# Altium PCB JDB-001.PcbDoc (part 1 of 2)
Units mil, origin at the board's own origin, x right, y up, seen from the top; angles counter-clockwise.
Board outline 2292 x 2004 mil, 4 copper layers (Top, Layer 2, Layer 3, Bottom), stack 24.2 mil thick; 85 components, 86 nets, 377 pads, 352 vias.
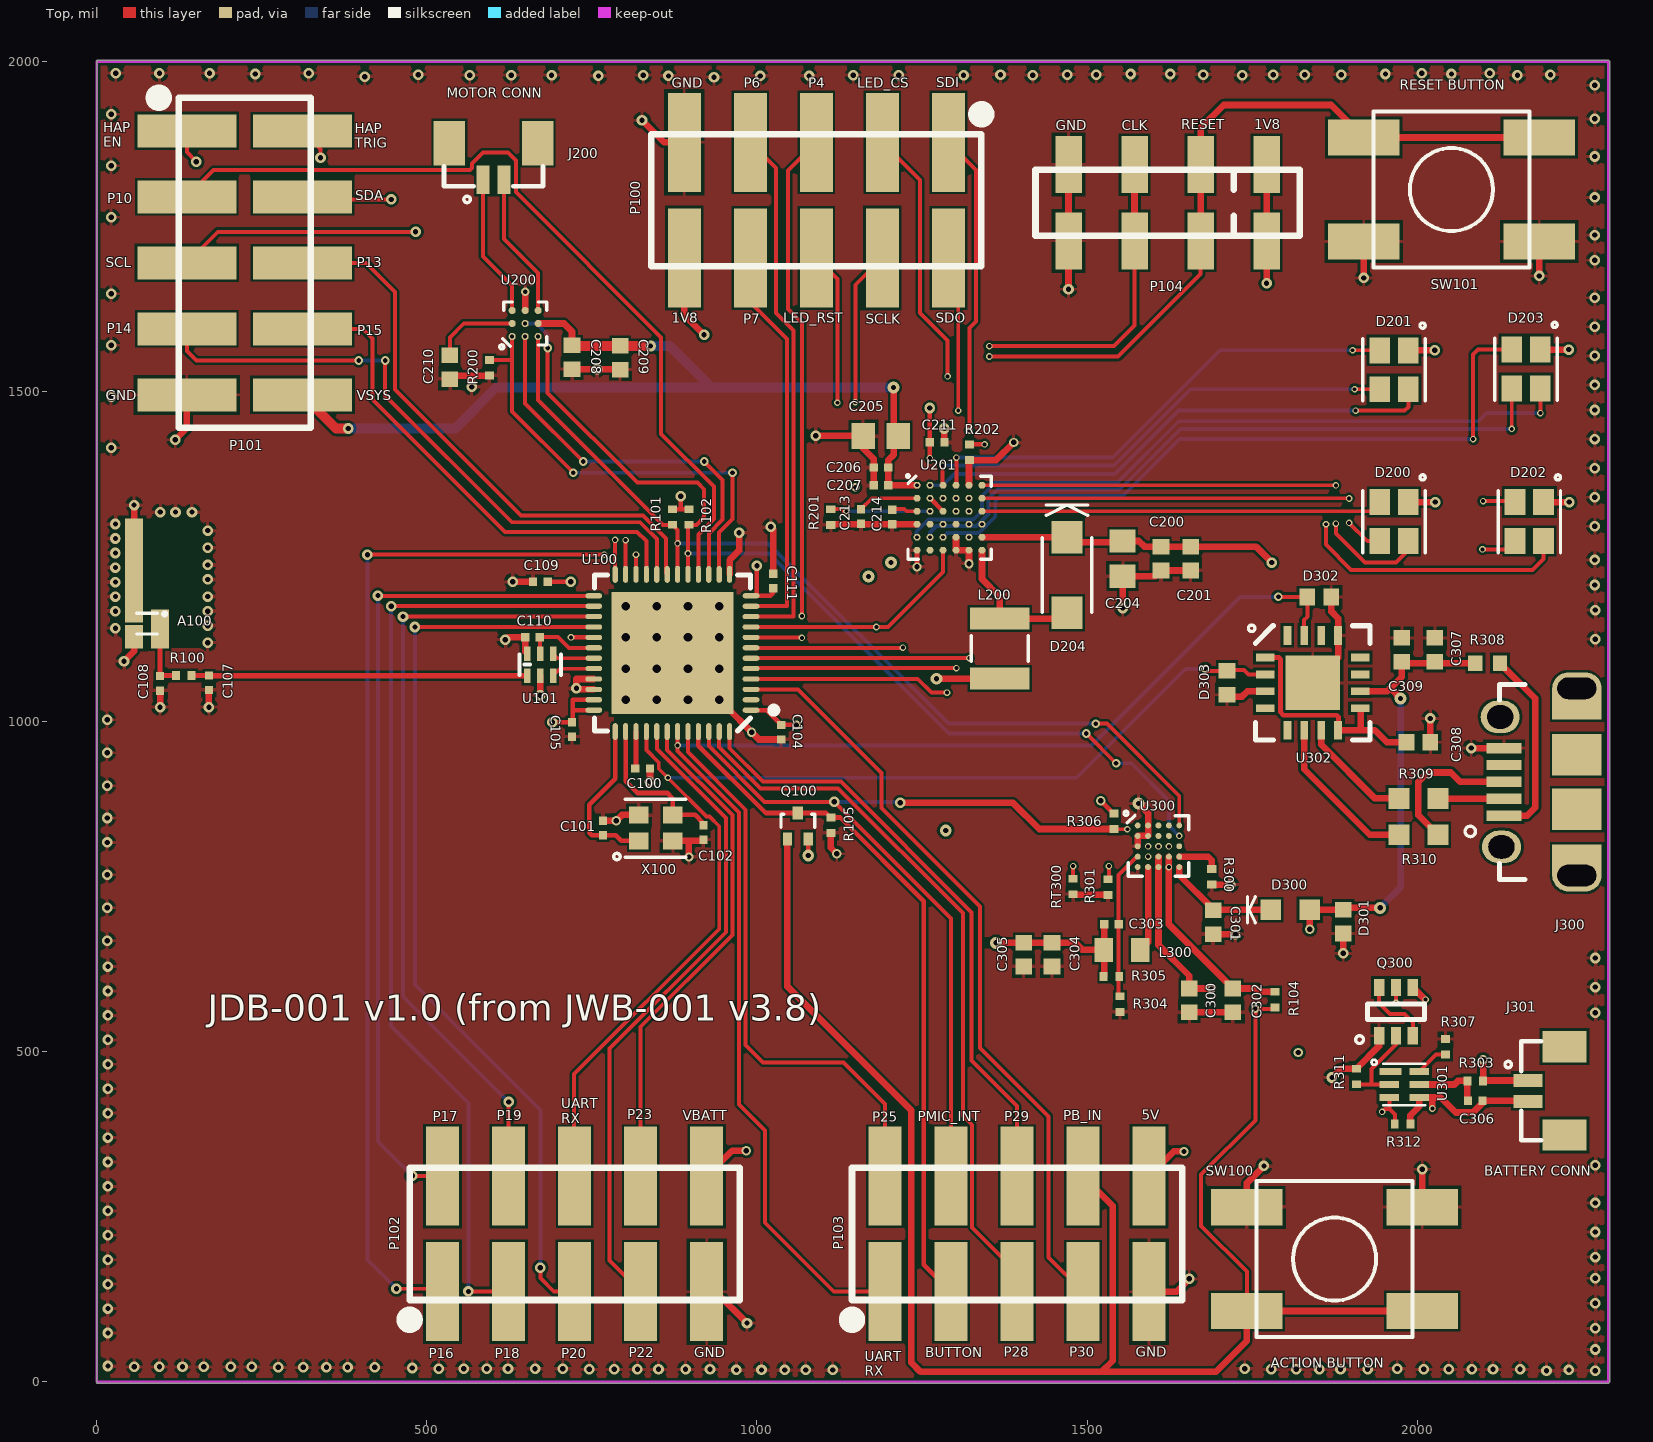
[diagram p0: Top view]
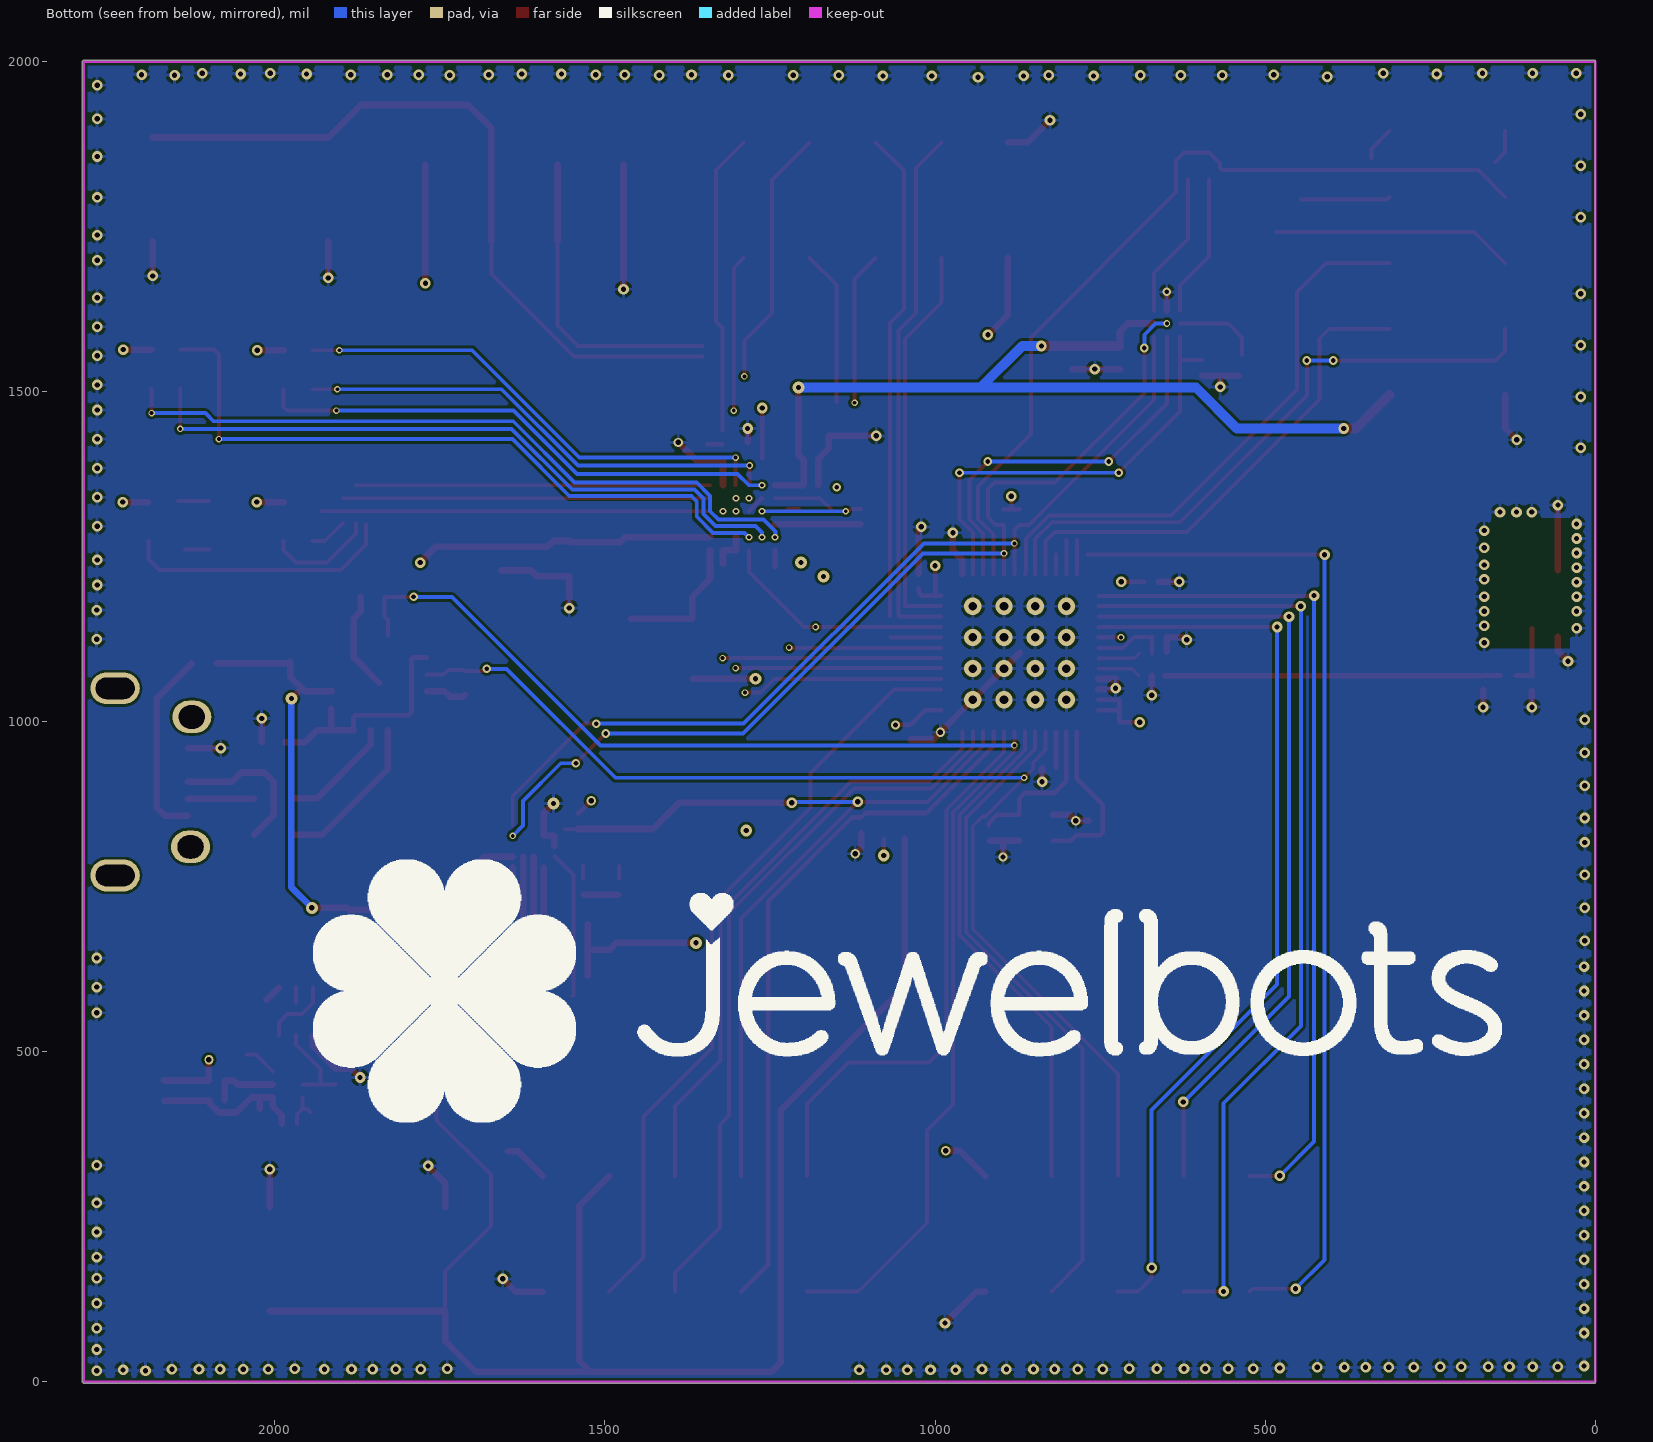
[diagram p1: Bottom view, seen from below]
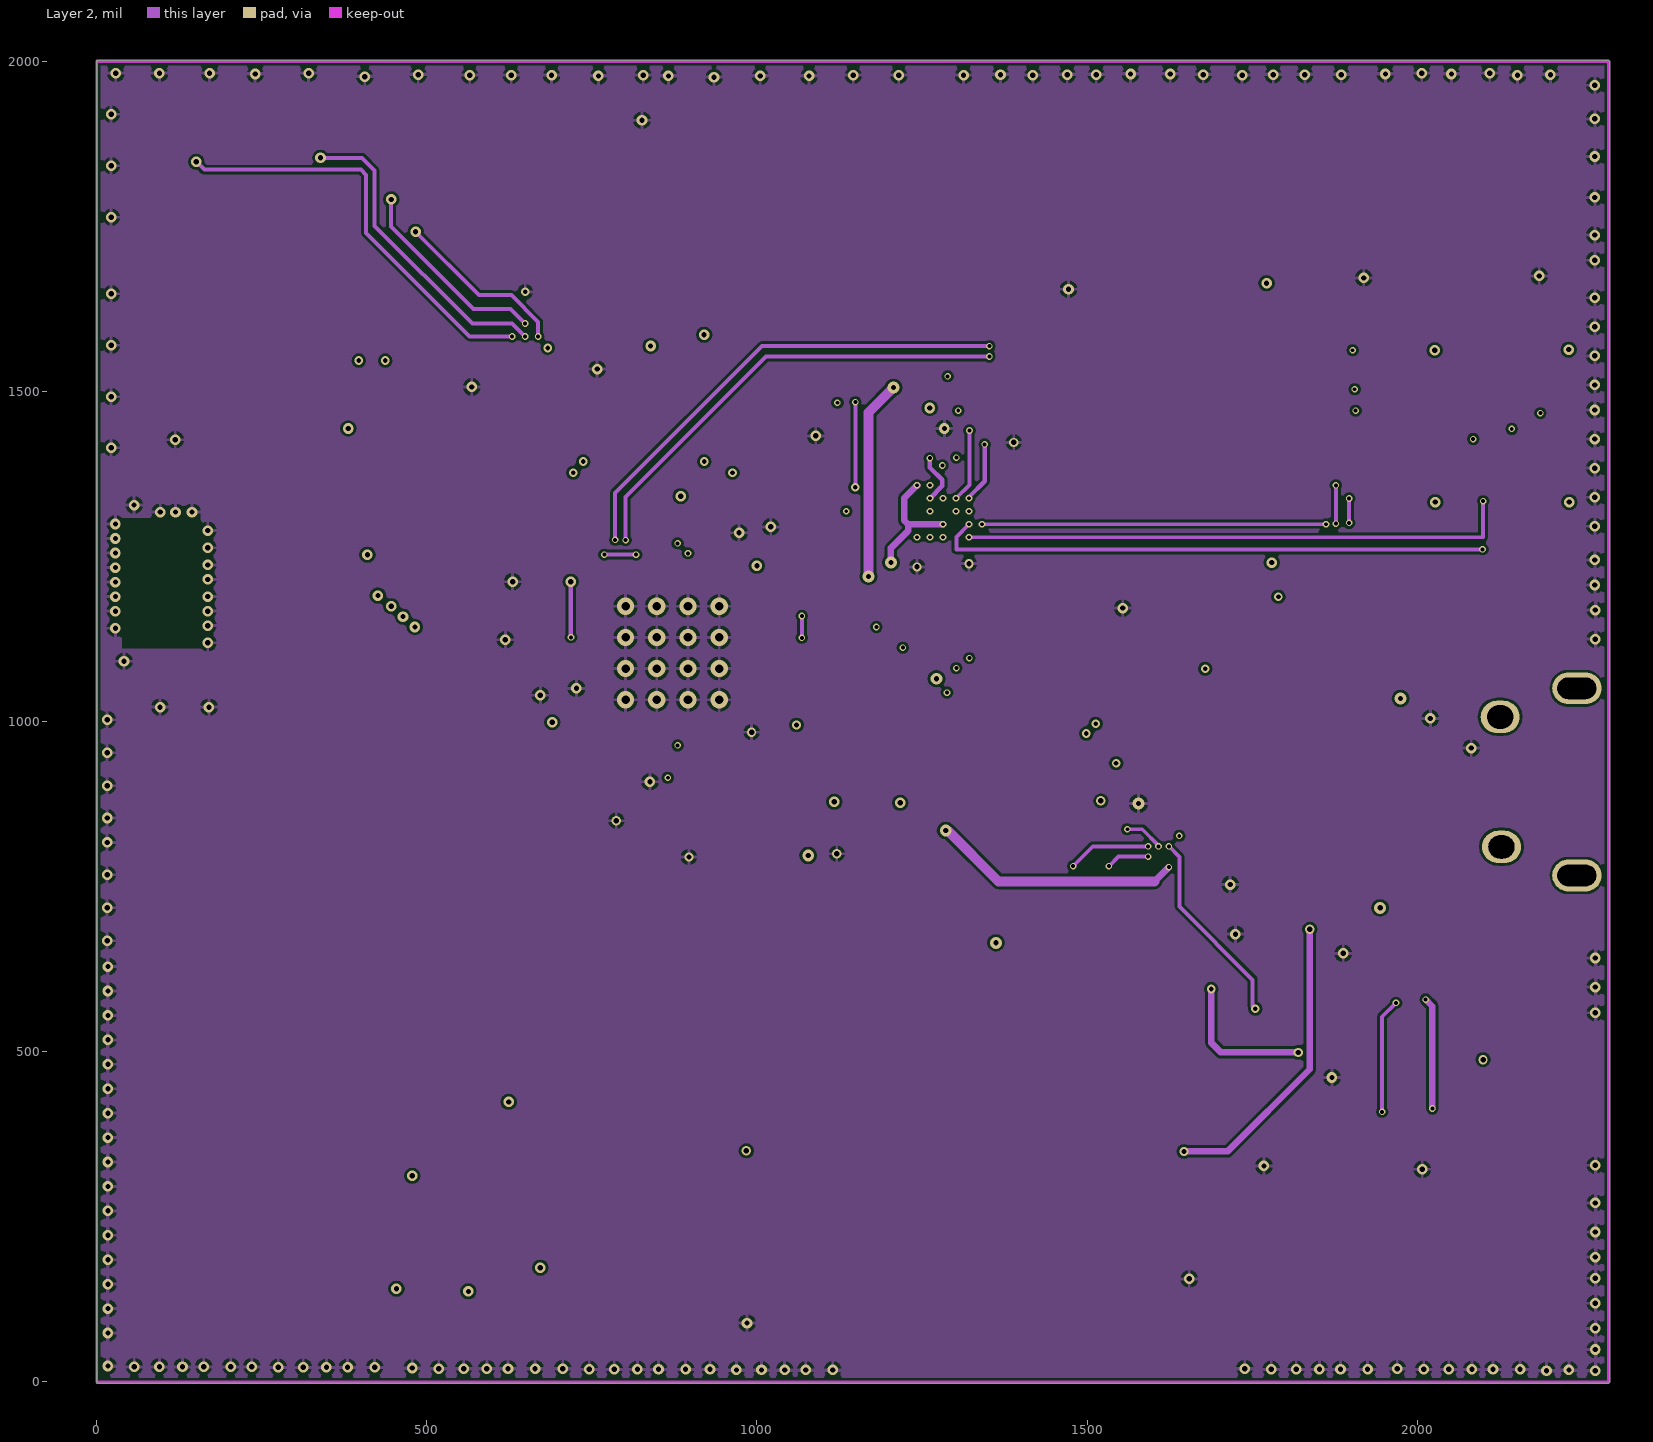
[diagram p2: Layer 2]
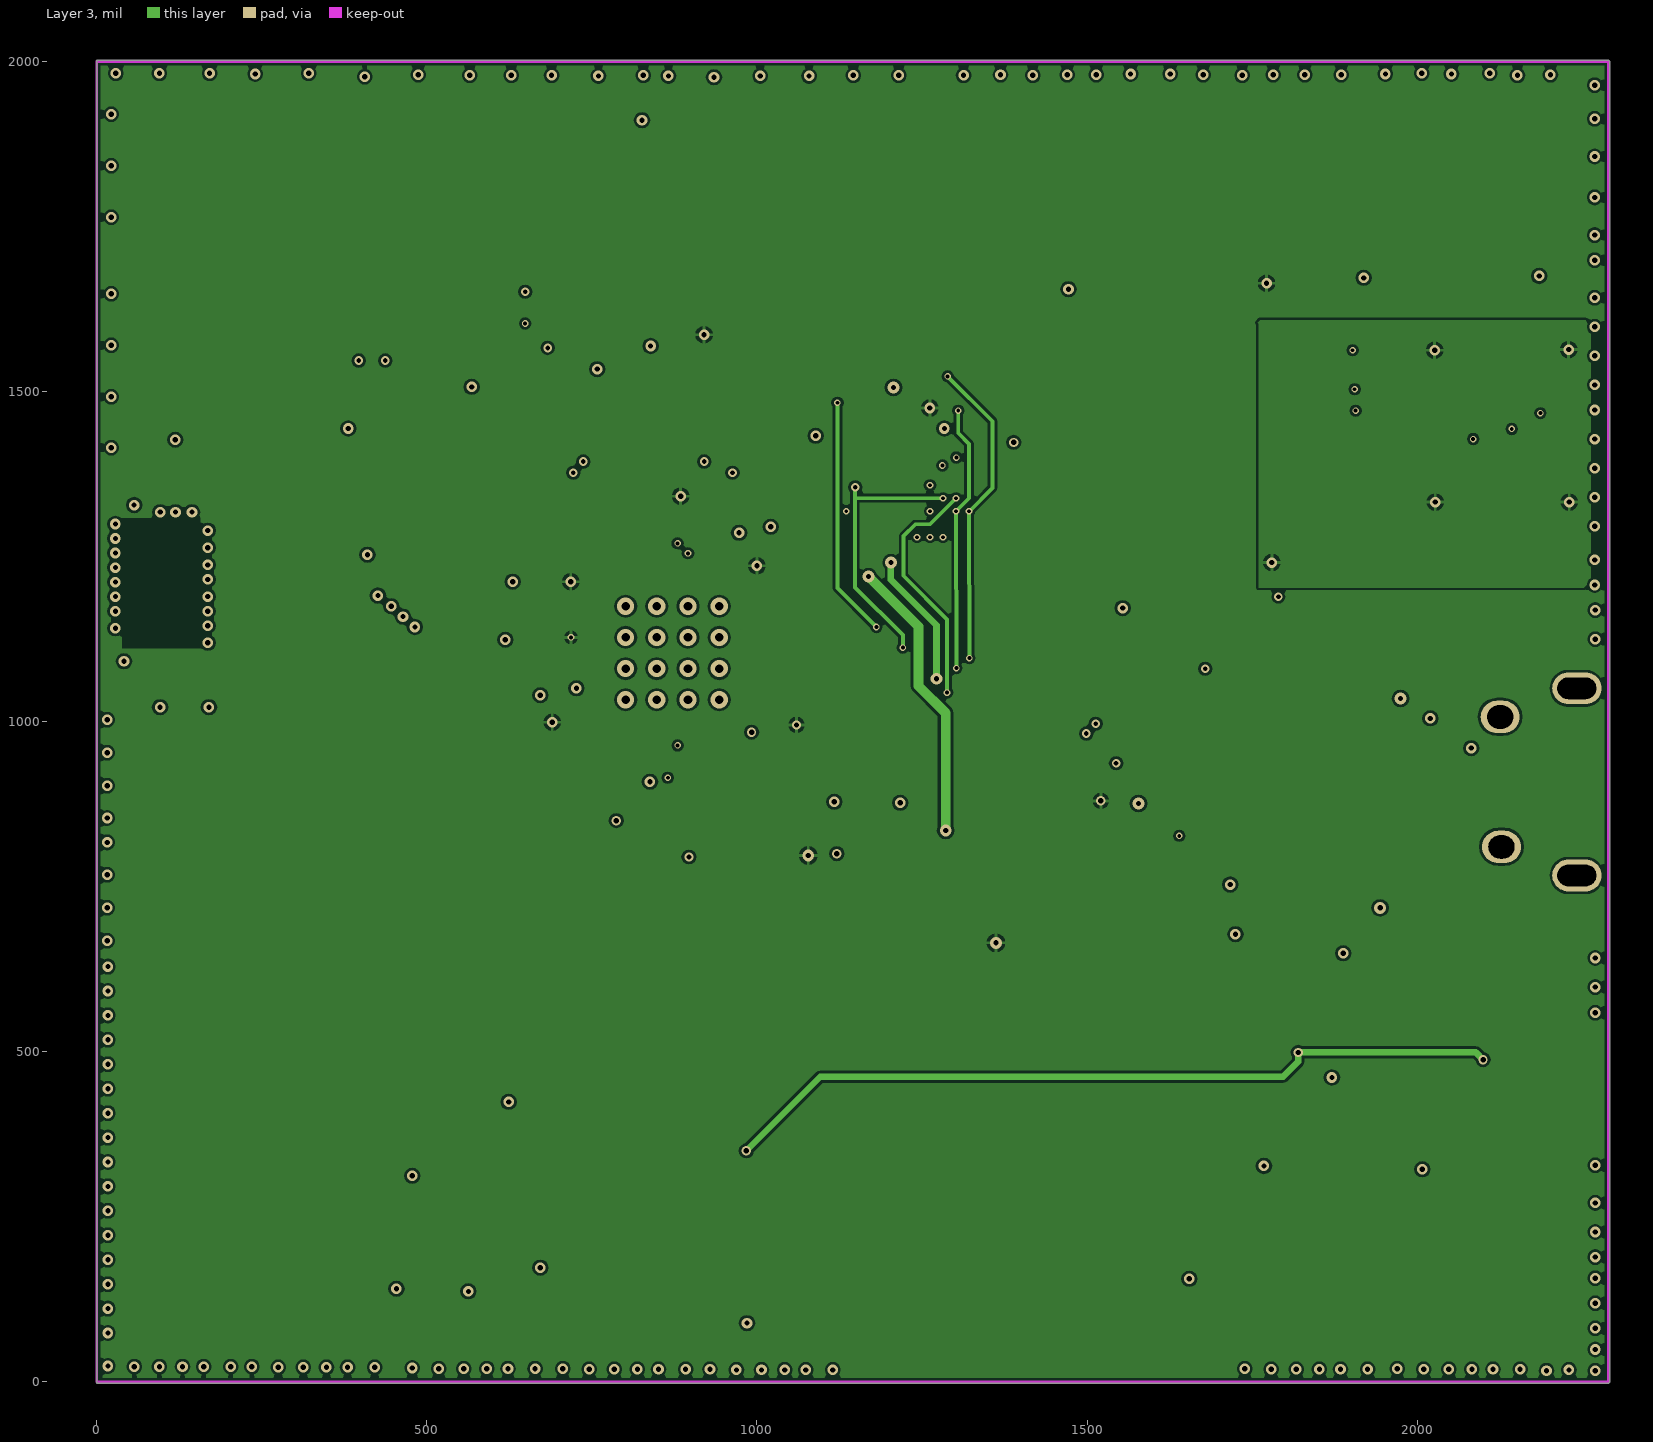
[diagram p3: Layer 3]

## Layer stack, top to bottom
Top Solder: solder mask 0.4, Solder Resist, Dk 3.5
Top: signal copper 1.4
Core 1: prepreg 5, FR-4, Dk 4.2
Layer 2: signal copper 0.7
Core 2: core 10, FR-4, Dk 4.2
Layer 3: signal copper 0.7
Core 3: prepreg 5, FR-4, Dk 4.2
Bottom: signal copper 1.4
Bottom Solder: solder mask 0.4, Solder Resist, Dk 3.5

## Board outline
0,-2 2290,-2 2292,0 2292,2000 2290,2002 0,2002

## Design rules (kind name [scope] priority, off if disabled: settings)
Clearance Clearance_U200 [InComponent('U200') OR InComponent('U201')] p1: gap=4 except(2.92: Arc-Track Arc-SMDPad Track-Track Track-SMDPad; 2.99: SMDPad-SMDPad; 3: Arc-Arc Arc-THPad Arc-Via Track-THPad Track-Via SMDPad-THPad SMDPad-Via THPad-THPad THPad-Via Via-Via)
Clearance [All] p2: gap=4
Height [All] p1: minheight=0 maxheight=1000 prefheight=100
HoleSize [All] p1: absolutevalues=TRUE maxlimit=100 minlimit=6 maxpercent=80.000 minpercent=20.000
HoleToHoleClearance [All] p1: gap=6 allowstackedmicrovias=TRUE
MinimumSolderMaskSliver [All] p1: minsoldermaskwidth=1
PlaneClearance [All] p1: clearance=4
PolygonConnect [All] p1: connectstyle=Relief reliefconductorwidth=5 reliefentries=4 polygonreliefangle="90 Angle" airgapwidth=5
RoutingVias [All] p1: holewidth=7 width=13 viastyle="Through Hole" minholewidth=6 minwidth=10 maxholewidth=28 maxwidth=50
SilkToSilkClearance [All] p1: silktosilkclearance=1
SilkToSolderMaskClearance [IsPad] p1: minsilkscreentomaskgap=0 clearancetoexposedcopper=TRUE
SolderMaskExpansion SolderMaskExpansion_via [IsVia] p1: expansion=-10
SolderMaskExpansion [All] p2: expansion=2
Width [All] p1: maxlimit=100 minlimit=4 preferedwidth=6
23 further rules are at their usual default settings.

## Classes and differential pairs
component class Interfaces: C200 C201 C204 C205 C206 C207 C208 C209 C210 C211 C213 C214 D200 D201 D202 D203 D204 J200 L200 R200 R201 R202 U200 U201
component class "Power Supplies": C300 C301 C302 C303 C304 C305 C306 C307 C308 C309 D300 D301 D302 D303 J300 J301 L300 Q300 R300 R301 R303 R304 R305 R306 R307 R308 R309 R310 R311 R312 RT300 U300 U301 U302
component class Top: A100 C100 C101 C102 C104 C105 C107 C108 C109 C110 C111 P100 P101 P102 P103 P104 Q100 R100 R101 R102 R104 R105 SW100 SW101 U100 U101 X100

## Components (designator, comment, footprint, x,y, rotation, side; value= is the part's Value field where it differs from the comment)
A100 "Part Number" 2450AT07A0100 76.35,1148.4 r90 top
C100 "Part Number0.1uFDNP" "Cap 0201 HD" 827,929 r0 top
C101 "Part Number15pFDNP" "Cap 0201 HD" 767,839 r90 top
C102 "Part Number15pFDNP" "Cap 0201 HD" 919,832 r270 top
C104 "Part Number0.1uFDNP" "Cap 0201 HD" 1037,984 r270 top
C105 "Part Number1nFDNP" "Cap 0201 HD" 720,988 r270 top
C107 "Part NumberDNPDNP" "Cap 0201 HD" 170,1058.98 r270 top
C108 "Part NumberDNPDNP" "Cap 0201 HD" 96,1057.98 r270 top
C109 "Part Number47nFDNP" "Cap 0201 HD" 672,1212 r180 top
C110 "Part Number2.2nFDNP" "Cap 0201 HD" 660,1128 r180 top
C111 "Part Number0.1uFDNP" "Cap 0201 HD" 1025,1213 r90 top
C200 "Part Number1.0uFDNP" "Cap 0402 HD" 1612,1247 r270 top
C201 "Part Number1.0uFDNP" "Cap 0402 HD" 1657,1247 r270 top
C204 "Part Number10uFDNP" "Cap 0603" 1554,1247 r270 top
C205 "Part Number10uFDNP" "Cap 0603" 1187.79,1432.84 r180 top
C206 "Part Number0.1uFDNP" "Cap 0201 HD" 1187.79,1384.84 r180 top
C207 "Part Number0.1uFDNP" "Cap 0201 HD" 1187.79,1357.84 r180 top
C208 "Part Number4.7uFDNP" "Cap 0402 HD" 720,1552 r270 top
C209 "Part Number1.0uFDNP" "Cap 0402 HD" 793,1551 r270 top
C210 "Part Number1.0uFDNP" "Cap 0402 HD" 535,1537 r270 top
C211 "Part Number0.1uFDNP" "Cap 0201 HD" 1273,1423 r0 top
C213 "Part Number1.0uFDNP" "Cap 0201 HD" 1157.79,1310.84 r270 top
C214 "Part Number0.1uFDNP" "Cap 0201 HD" 1204.79,1309.84 r90 top
C300 "Part Number4.7uFDNP" "Cap 0402 HD" 1655,577.73 r270 top
C301 "Part Number1.0uFDNP" "Cap 0402 HD" 1691,696.23 r270 top
C302 "Part Number4.7uFDNP" "Cap 0402 HD" 1721,577.73 r270 top
C303 "Part Number22pFDNP" "Cap 0201 HD" 1537,693.23 r0 top
C304 "Part Number4.7uFDNP" "Cap 0402 HD" 1447,647.23 r270 top
C305 "Part Number1.0uFDNP" "Cap 0402 HD" 1404,647.23 r270 top
C306 "Part Number0.1uFDNP" "Cap 0201 HD" 2088,425.73 r0 top
C307 "Part Number1.0uFDNP" "Cap 0402 HD" 2027,1108.73 r90 top
C308 "Part Number0.1uFDNP" "Cap 0402 HD" 2002,968.73 r0 top
C309 "Part Number4.7uFDNP" "Cap 0402 HD" 1977,1108.73 r90 top
D200 "Part Number" 4-PLCC 1965,1303 r90 top
D201 "Part Number" 4-PLCC 1965,1533 r90 top
D202 "Part Number" 4-PLCC 2170,1303 r90 top
D203 "Part Number" 4-PLCC 2165,1534 r90 top
D204 "Part NumberVoltage Rated" SOD-123F_U 1469.79,1221.84 r270 top
D300 "Part NumberVoltage Rated" "Diode 0603 HD" 1808,715.23 r180 top
D301 "Part NumberVoltage Rated" "CAP 0402 HD" 1888,697.23 r270 top
D302 "Part NumberVoltage Rated" "CAP 0402 HD" 1852,1188.73 r180 top
D303 "Part NumberVoltage Rated" "CAP 0402 HD" 1712,1058.73 r270 top
J200 "BM02B-SURS-TF" BM02B-SURS-TF 601,1821 r0 top
J300 "Part Number" USB_Micro_RA_W-TABS 2242,908.73 r90 top
J301 "BM02B-SURS-TF" BM02B-SURS-TF 2168,440.73 r270 top
L200 "Part Number4.7uHDNP" "IND 1008" 1367.79,1110.84 r90 top
L300 "Part Number2.2uHDNP" "IND 0603" 1553,654.23 r180 top
P100 "Value" "Molex 15-91-2100" 1090,1790 r180 top
P101 "Value" "Molex 15-91-2100" 224,1695 r270 top
P102 "Value" "Molex 15-91-2100" 724,224 r0 top
P103 "Value" "Molex 15-91-2100" 1394,224 r0 top
P104 "Value" LIST_1x4_SMD 1772,1786 r180 top
Q100 "Part Number" SOT-723 1062,842 r90 top
Q300 "Part Number" SC70-6 1968,560.73 r90 top
R100 "Part Number0DNP" "RES 0201 HD" 132,1069.98 r180 top
R101 "Part Number3.3kDNP" "RES 0201 HD" 872,1310 r90 top
R102 "Part Number3.3kDNP" "RES 0201 HD" 897,1310 r90 top
R104 "Part Number10kDNP" "RES 0201 HD" 1785,579 r90 top
R105 "Part Number10kDNP" "RES 0201 HD" 1112,843 r90 top
R200 "Part Number10kDNP" "RES 0201 HD" 595,1536 r90 top
R201 "Part Number82kDNP" "RES 0201 HD" 1111.79,1309.84 r90 top
R202 "Part Number30.1kDNP" "RES 0201 HD" 1322,1408 r90 top
R300 "Part Number4.12kDNP" "RES 0201 HD" 1689,765.04 r90 top
R301 "Part Number10kDNP" "RES 0201 HD" 1532,749.42 r90 top
R303 "Part Number330DNP" "RES 0201 HD" 2088,455.73 r0 top
R304 "Part Number150kDNP" "RES 0201 HD" 1550,572.23 r90 top
R305 "Part Number301kDNP" "RES 0201 HD" 1537,614.23 r180 top
R306 "Part Number10kDNP" "RES 0201 HD" 1541,849.23 r90 top
R307 "Part Number2.2kDNP" "RES 0201 HD" 2043,507.54 r270 top
R308 "Part Number0DNP" "RES 0402" 2107,1088.73 r180 top
R309 "Part Number27DNP" "RES 0603 HD" 2002,883.73 r180 top
R310 "Part Number27DNP" "RES 0603 HD" 2002,828.73 r180 top
R311 "Part NumberDNPDNP" "RES 0201 HD" 1908,462.54 r270 top
R312 "Part NumberDNPDNP" "RES 0201 HD" 1978,390.73 r180 top
RT300 "Res Thermal" "RES 0201 HD" 1479,750.23 r270 top
SW100 "Value" ALPS_SKHUxxx010_WO_GND 1875,186 r180 top
SW101 "Value" ALPS_SKHUxxx010_WO_GND 2052,1806 r0 top
U100 "NRF51822-QFAC-R" QFN40P600X600X90-48N 872,1104 r180 top
U101 "nRF51822 Balun RF filter" 2450BM14E0003 671,1087 r180 top
U200 "Part Number" BGA0.5P3x3-9Pin 649,1603 r90 top
U201 "Part NumberDNP" BGA0.5P6x6-36Pin 1291.79,1308.84 r0 top
U300 "Part NumberDNP" BGA0.4P5x5-25Pin 1608.25,811.23 r0 top
U301 "Part Number" SON0.5P-6Pin 1980.64,450.42 r0 top
U302 "Part Number" QFN0.65P4x4-16Pin_W-Pad 1842,1058.73 r0 top
X100 "Part NumberDNP" XTAL_ABM11-16 847,839 r0 top

## Footprints (in the part's own frame and the unit in brackets; to place one, negate y for a bottom-side part, rotate by r counter-clockwise, add the part's x,y. Pads: shape width x height; smd on the part's side, far side on the other; paste and mask are expansions set on the pad)
4-PLCC [mm] "4 Pin Plastic Leaded Chip Carrier, 2mm x 2mm"
  rect 1x0.8 smd: 1(0.75,-0.55) 2(-0.75,-0.55) 3(-0.75,0.55) 4(0.75,0.55)
  silkscreen extent -1.2,-1.2 1.8,1.2, body extent -1.05,-1.05 1.05,1.05, height 1
2450AT07A0100 [mm] "Chip Antenna, 4 pin w/keepout area"
  rect 1.5x0.7 smd paste-0.4 mask-0.4: 1(-0.2,-0.5)
  rect 4x0.7 smd paste-2 mask-2: 2(2.05,0.5)
  rect 0.9x0.7 smd paste-0.45 mask-0.45: 3(-0.5,0.5)
  Multi-Layer pour cut-out: -0.95,0.95 -0.95,-2.05 4.05,-2.05 4.05,0.95
  silkscreen extent -0.4,-0.74 0.44,0.4, body extent -0.25,-0.5 0.25,0.5, height 0.37
2450BM14E0003 [mm] "nRF51822 Balun"
  rect 0.25x0.55 smd: 1(0.48,0.443) 2(-0.02,0.443) 3(-0.52,0.443) 4(-0.52,-0.407) 5(-0.02,-0.407) 6(0.48,-0.407)
  silkscreen extent -0.82,-0.38 0.78,0.42, body extent -0.82,-0.39 0.78,0.43, height 0.62
ALPS_SKHUxxx010_WO_GND [mm]
  rect 2.75x1.4 smd: 1(-3.375,2) 1(3.375,2) 2(-3.375,-2) 2(3.375,-2)
  silkscreen extent -3,-3 3,3, body extent -4,-3 4,3.3, height 3.1
BGA0.4P5x5-25Pin [mil] "XBGA 0.4mm pitch, 5 row x 5 column, 25 Pin, 2mm x 2mm, TI S-XBGA-N25 YFF"
  rrect100% 9x9 smd mask+1.97: A1(-31.5,31.5) A2(-15.75,31.5) A3(0,31.5) A4(15.75,31.5) A5(31.5,31.5) B1(-31.5,15.75) B2(-15.75,15.75) B3(0,15.75) B4(15.75,15.75) B5(31.5,15.75) C1(-31.5,0) C2(-15.75,0) C3(0,0) C4(15.75,0) C5(31.5,0) D1(-31.5,-15.75) D2(-15.75,-15.75) D3(0,-15.75) D4(15.75,-15.75) D5(31.5,-15.75) E1(-31.5,-31.5) E2(-15.75,-31.5) E3(0,-31.5) E4(15.75,-31.5) E5(31.5,-31.5)
  silkscreen extent -52,-46 46,53, body extent -41,-41 41,41, height 25
BGA0.5P3x3-9Pin [mm] "DSBGA 0.5mm pitch, 3 row x 3 column, 9 Pin, 1.47mm x 1.47mm, TI S-XBGA-N9 YZF"
  round 0.275 smd paste+0 mask+0.05: A1(-0.5,0.5) A2(0,0.5) A3(0.5,0.5) B1(-0.5,0) B2(0,0) B3(0.5,0) C1(-0.5,-0.5) C2(0,-0.5) C3(0.5,-0.5)
  silkscreen extent -0.98,-0.82 0.83,0.98, body extent -0.73,-0.73 0.72,0.73, height 0.63
BGA0.5P6x6-36Pin [mm] "BGA,Pitch 0.5mm, 36 Pin 6x6, Body 3x3mm"
  round 0.265 smd paste-0.132 mask+0.05: A1(-1.25,1.25) A2(-0.75,1.25) A3(-0.25,1.25) A4(0.25,1.25) A5(0.75,1.25) A6(1.25,1.25) B1(-1.25,0.75) B2(-0.75,0.75) B3(-0.25,0.75) B4(0.25,0.75) B5(0.75,0.75) B6(1.25,0.75) C1(-1.25,0.25) C2(-0.75,0.25) C3(-0.25,0.25) C4(0.25,0.25) C5(0.75,0.25) C6(1.25,0.25) D1(-1.25,-0.25) D2(-0.75,-0.25) D3(-0.25,-0.25) D4(0.25,-0.25) D5(0.75,-0.25) D6(1.25,-0.25) E1(-1.25,-0.75) E2(-0.75,-0.75) E3(-0.25,-0.75) E4(0.25,-0.75) E5(0.75,-0.75) E6(1.25,-0.75) F1(-1.25,-1.25) F2(-0.75,-1.25) F3(-0.25,-1.25) F4(0.25,-1.25) F5(0.75,-1.25) F6(1.25,-1.25)
  silkscreen extent -1.65,-1.6 1.6,1.65, body extent -1.53,-1.53 1.53,1.53, height 0.68
BM02B-SURS-TF [mm]
  rect 1.2x1.7 smd: 0(-1.7,1.4) 0(1.7,1.4)
  rect 0.5x1.1 smd: 1(-0.4,0) 2(0.4,0)
  silkscreen extent -1.91,-0.89 1.91,0.51, body extent -1.9,-0.28 1.9,1.97, height 2.7
"Cap 0201 HD" [mm] "Chip Capacitor, 2-Leads, Body 0.60x0.30mm, IPC High Density"
  rect 0.32x0.32 smd mask+0.05: 1(-0.28,0) 2(0.28,0)
  body extent -0.32,-0.17 0.32,0.17, height 0.33
"Cap 0402 HD" [mm] "Chip Capacitor, 2-Leads, Body 1.00x0.50mm, IPC Medium Density"
  rect 0.6x0.64 smd: 1(-0.46,0) 2(0.46,0)
  body extent -0.55,-0.3 0.55,0.3, height 0.6
"CAP 0402 HD" [mm] "Chip Capacitor, 2-Leads, Body 1.00x0.50mm, IPC Medium Density"
  rect 0.6x0.64 smd: 1(-0.46,0) 2(0.46,0)
  body extent -0.55,-0.3 0.55,0.3, height 0.6
"Cap 0603" [mm]
  rect 0.9x1 smd: 1(-0.675,0) 2(0.675,0)
  body extent -0.87,-0.48 0.87,0.47, height 0.85
"Diode 0603 HD" [mm] "Chip Diode, 2-Leads, Body 1.80x1.0mm, IPC High Density"
  rect 0.8x0.8 smd: A(-0.75,0) C(0.75,0)
  silkscreen extent 1.35,-0.5 1.65,0.5, body extent -0.9,-0.5 0.9,0.5, height 0.85
"IND 0603" [mm] "Chip Inductor 0603, 2-Leads, Body 1.60x0.80mm, IPC High Density"
  rect 0.71x0.92 smd: 1(-0.7,0) 2(0.7,0)
  body extent -0.9,-0.5 0.9,0.5, height 1
"IND 1008" [mm] "Inductor 1008, 2.7mm x 2.2mm"
  rect 0.85x2.3 smd: 1(-1.15,0) 2(1.15,0)
  silkscreen extent -0.5,-1.1 0.5,1.1, body extent -1.35,-1.1 1.35,1.12, height 1
LIST_1x4_SMD [mm]
  rect 1.02x2.19 smd: 1(0,1.465) 1(0,-1.465) 2(2.54,-1.465) 2(2.54,1.465) 3(5.08,-1.465) 3(5.08,1.465) 4(7.62,-1.465) 4(7.62,1.465)
  silkscreen extent -1.27,-1.27 8.89,1.27, body extent -1.27,-2.5 8.89,2.5, height 9.82
"Molex 15-91-2100" [mil]
  rect 50x150 smd: 1(-200,-87.5) 2(-200,87.5) 3(-100,-87.5) 4(-100,87.5) 5(0,-87.5) 6(0,87.5) 7(100,-87.5) 8(100,87.5) 9(200,-87.5) 10(200,87.5)
  silkscreen extent -260,-140 250,100, body extent -250,-138 250,138, height 380
QFN0.65P4x4-16Pin_W-Pad [mm] "QFN, 16-Leads, Body 4x4mm, Pitch 0.65mm, Thermal Pad 2.1x2.1mm, IPC High Density"
  rect 0.72x0.3 smd: 1(-1.825,0.975) 2(-1.825,0.325) 3(-1.825,-0.325) 4(-1.825,-0.975) 9(1.825,-0.975) 10(1.825,-0.325) 11(1.825,0.325) 12(1.825,0.975)
  rect 0.3x0.72 smd: 5(-0.975,-1.825) 6(-0.325,-1.825) 7(0.325,-1.825) 8(0.975,-1.825) 13(0.975,1.825) 14(0.325,1.825) 15(-0.325,1.825) 16(-0.975,1.825)
  rect 2.1x2.1 smd paste-1.05: 17(0,0)
  silkscreen extent -2.47,-2.2 2.2,2.22, body extent -2.05,-2.05 2.05,2.05, height 0.8
QFN40P600X600X90-48N [mm]
  oval 0.65x0.2 smd: 1(-3.025,2.2) 2(-3.025,1.8) 3(-3.025,1.4) 4(-3.025,1) 5(-3.025,0.6) 6(-3.025,0.2) 7(-3.025,-0.2) 8(-3.025,-0.6) 9(-3.025,-1) 10(-3.025,-1.4) 11(-3.025,-1.8) 12(-3.025,-2.2) 25(3.025,-2.2) 26(3.025,-1.8) 27(3.025,-1.4) 28(3.025,-1) 29(3.025,-0.6) 30(3.025,-0.2) 31(3.025,0.2) 32(3.025,0.6) 33(3.025,1) 34(3.025,1.4) 35(3.025,1.8) 36(3.025,2.2)
  oval 0.2x0.65 smd: 13(-2.2,-3.025) 14(-1.8,-3.025) 15(-1.4,-3.025) 16(-1,-3.025) 17(-0.6,-3.025) 18(-0.2,-3.025) 19(0.2,-3.025) 20(0.6,-3.025) 21(1,-3.025) 22(1.4,-3.025) 23(1.8,-3.025) 24(2.2,-3.025) 37(2.2,3.025) 38(1.8,3.025) 39(1.4,3.025) 40(1,3.025) 41(0.6,3.025) 42(0.2,3.025) 43(-0.2,3.025) 44(-0.6,3.025) 45(-1,3.025) 46(-1.4,3.025) 47(-1.8,3.025) 48(-2.2,3.025)
  rect 4.7x4.7 smd: 49(0,0)
  silkscreen extent -4.03,-3 3,3, body extent -3,-3 3,3, height 0.9
"RES 0201 HD" [mm] "Resistor, 0201 High Density"
  rect 0.3x0.35 smd mask+0.05: 1(-0.3,0) 2(0.3,0)
  body extent -0.32,-0.16 0.32,0.17, height 0.26
"RES 0402" [mm] "Chip Resistor, 2-Leads, Body 1.05x0.54mm, IPC Medium Density"
  rect 0.55x0.6 smd: 1(-0.475,0) 2(0.475,0)
  body extent -0.55,-0.3 0.55,0.3, height 0.4
"RES 0603 HD" [mm] "Chip Resistor, 2-Leads, Body 1.60x0.82mm, IPC High Density"
  rect 0.8x0.8 smd: 1(-0.75,0) 2(0.75,0)
  body extent -0.85,-0.48 0.85,0.48, height 0.55
SC70-6 [mm] "SC70-6, 6-Pin, Body 2.00x2.10mm, Pitch 0.65mm, IPC High Density"
  rect 0.66x0.4 smd: 1(-0.925,0.65) 2(-0.925,0) 3(-0.925,-0.65) 4(0.925,-0.65) 5(0.925,0) 6(0.925,0.65)
  silkscreen extent -1.22,-1.1 0.3,1.55, body extent -0.67,-1.1 0.67,1.1, height 1.1
SOD-123F_U [mm] "SOD-123F, Unidirectional, 2-Leads, Body 1.65x3.60mm, IPC High Density"
  rect 1.25x1.2 smd: A(1.45,0) C(-1.45,0)
  silkscreen extent -2.7,-0.95 1.43,0.95, body extent -1.45,-0.9 1.45,0.9, height 0.98
SON0.5P-6Pin [mm] "Small Outline No-Lead Package, 0.5pitch, 6 pin, no thermal pad, 1.5mm x 1.5mm"
  rect 0.85x0.28 smd mask+0.05: 1(-0.525,0.5)
  rect 0.75x0.28 smd mask+0.05: 2(-0.575,0) 3(-0.575,-0.5) 4(0.575,-0.5) 5(0.575,0) 6(0.575,0.5)
  silkscreen extent -1.26,-0.8 0.8,0.95, body extent -0.77,-0.78 0.77,0.77, height 0.8
SOT-723 [mm] "SOT-723, 3-Leads, 1.20mm x 1.20mm, Pitch 0.40mm, IPC High Density"
  rect 0.5x0.36 smd: 1(-0.5,0.4) 2(-0.5,-0.4)
  rect 0.5x0.4 smd: 3(0.5,0)
  silkscreen extent -0.05,-0.65 0.45,0.65, body extent -0.45,-0.65 0.45,0.65, height 0.55
USB_Micro_RA_W-TABS [mm] "USB Micro-AB Connector, 5-Leads, Pitch 0.65mm, 8mm x 5mm"
  rect 0.4x1.35 smd: 1(-1.3,2.8) 2(-0.65,2.8) 3(0,2.8) 4(0.65,2.8) 5(1.3,2.8)
  oval 1.225x1.9 hole 0.825 slot 1.5 at 90 deg: 6(-3.6,0) 6(3.6,0.001)
  rect 1.2x1.9 smd: 6(-3,0) 6(3,0)
  oval 1.25x1.5 hole 0.9 slot 1 at 90 deg: 6(-2.5,2.9) 6(2.5,2.95)
  rect 1.6x1.9 smd: 6(-1.05,0) 6(1.05,0)
  silkscreen extent -3.75,2 3.75,4.3, body extent -4,-2.62 4,3.43, height 2.83
XTAL_ABM11-16 [mm] "Crystal, 4 lead, 2.0mm x 1.6mm"
  rect 0.75x0.65 smd: 1(-0.65,-0.5) 2(0.65,-0.5) 3(0.65,0.5) 4(-0.65,0.5)
  silkscreen extent -1.62,-1.22 1.15,1.1, body extent -0.97,-0.8 1.03,0.8, height 0.58

## Part data
A100: library part 2450AT07A0100, "ANTENNA SMD EIA 0402 2.4GHZ"
C100 C104 C111 C206 C207 C211 C214 C306: library part "Cap 0201 0.1uF 6.3V", "CAP CER 0.1UF 6.3V 10% X5R 0201"
C101 C102: library part "Cap 0201 11pF 25V", "CAP CER 15PF 25V NP0 0201"
C105: library part "Cap 0201 1nF 25V", "CAP CER 1000PF 25V 10% X7R 0201"
C107 C108: library part "Cap 0201 Generic", "Capacitor, Ceramic 0201, DNP"
C109: library part "Cap 0201 47nF 10V", "CAP CER 0.047UF 10V 10% X5R 0201"
C110: library part "Cap 0201 2.2nF 16V", "CAP CER 2200PF 16V 10% X7R 0201"
C200 C201 C209 C210 C301 C305 C307: library part "Cap 0402 1.0uF 10V", "CAP CER 1UF 10V 10% X5R 0402"
C204 C205: library part "Cap 0603 10uF 10V", "CAP CER 10UF 10V 20% X5R 0603"
C208 C300 C302 C304 C309: library part "Cap 0402 4.7uF 10V", "CAP CER 4.7UF 10V 20% X5R 0402"
C213: library part "Cap 0201 1.0uF 6.3V", "CAP CER 1UF 6.3V 20% X5R 0201"
C303: library part "Cap 0201 22pF 50V", "CAP CER 22PF 50V 5% NP0 0201"
C308: library part "Cap 0402 0.1uF 10V", "CAP CER 0.1UF 10V 10% X5R 0402"
D200 D201 D202 D203: library part CLMVB-FKA-CFHEHLCBB7A363, "LED RGB 3-IN-1 SMD 4PLCC"
D204: library part MBR120VLSFT3G, "DIODE SCHOTTKY 20V 1A SOD123FL"
D300: library part CDBU05x0, "DIODE SCHOTTKY 20V 500MA 0603"
D301 D302 D303: library part SESD0402P1BN-0450-090, "TVS DIODE 6VWM 12VC 0402"
J200 J301: "CONN HDR SUR TOP 2POS 0.8MM TIN"
J300: library part USB_Micro_B_W-Tabs, "CONN USB MICRO B RECPT SMT R/A"
L200: library part "Ind 1008 4.7uH 650mA", "FIXED IND 4.7UH 1A 250 MOHM SMD"
L300: library part "Ind 0603 2.2uH 160mA", "FIXED IND 2.2UH 600MA 170 MOHM"
P100 P101 P102 P103: library part CONN-10, "CONN HEADER 10POS .100\" VERT TIN"
P104: library part CONN-4, "BOARD-BOARD CONNECTOR HEADER, 4WAY, 1ROW"
Q100: library part MOSFET-P, "MOSFET P-CH 20V 0.1A VMT3"
Q300: library part Si1902CDL, "MOSFET 2N-CH 20V 1.1A SC-70-6"
R100: library part "Res 0201 0R Jumper", "RES SMD 0.0OHM JUMPER 1/20W 0201"
R101 R102: library part "Res 0201 3.3k 5%", "RES SMD 3.3K OHM 5% 1/20W 0201"
R104 R105 R200 R301 R306: library part "Res 0201 10k 5%", "RES SMD 10K OHM 5% 1/20W 0201"
R201: library part "Res 0201 Generic", "RES SMD 82K OHM 1% 1/20W 0201"
R202: library part "Res 0201 Generic", "RES SMD 30.1K OHM 1% 1/20W 0201"
R300: library part "Res 0201 Generic", "RES SMD 4.12K OHM 1% 1/20W 0201"
R303: library part "Res 0201 330R 5%", "RES SMD 330 OHM 5% 1/20W 0201"
R304: library part "Res 0201 150k 1%", "RES SMD 150K OHM 1% 1/20W 0201"
R305: library part "Res 0201 301k 1%", "RES SMD 301K OHM 1% 1/20W 0201"
R307: library part "Res 0201 2.2k 5%", "RES SMD 2.2K OHM 5% 1/20W 0201"
R308: library part "Res 0402 0R Jumper", "RES SMD 0.0OHM JUMPER 1/16W 0402"
R309 R310: library part "Res 0603 27R 5%", "RES SMD 27 OHM 5% 1/10W 0603"
R311 R312: library part "Res 0201 Generic", "Resistor, 0201, DNP"
RT300: library part "Therm 0201 10k NTC", "THERMISTOR 10K OHM NTC 0201 SMD"
SW100 SW101: library part SW-PB, "Tactile Switches 6.0x6.0x2.5mm 160gf"
U100: library part nRF51x22_QFAx, "IC SOC 2.4GHZ 256K FLASH 48QFN"
U101: "NORDIC NRF51 BALUN FILTER"
U200: library part DRV2604L, "IC ERM/LRA HAPTIC DRIVER 9DSBGA"
U201: library part LP55281TL, "IC LED DRIVER RGLTR DIM 36USMD"
U300: library part TPS65720, "PMU for IC PMU 2CH CONV/LDO 25DSBGA"
U301: library part BQ29700, "IC LITHIUM BATT PROTECT 6-SON"
U302: library part FT230XQ, "IC USB SERIAL BASIC UART 16QFN"
X100: library part XTAL_ABM11-16, "CRYSTAL 16.0000MHZ 10PF SMD"

## Via types
v1: diameter 16, hole 8, Top to Bottom, 218 vias
v2: diameter 10, hole 6, Top to Layer 2, 41 vias
v3: diameter 10, hole 6, Top to Bottom, 33 vias
v4: diameter 25.98, hole 12.99, Top to Bottom, 16 vias
v5: diameter 13, hole 7, Top to Bottom, 14 vias
v6: diameter 18, hole 8, Top to Bottom, 10 vias
v7: diameter 14, hole 8, Top to Bottom, 10 vias
v8: diameter 16, hole 8, Top to Layer 2, 4 vias
v9: diameter 14, hole 8, Top to Layer 2, 4 vias
v10: diameter 13, hole 7, Top to Layer 2, 2 vias

## Nets (pads, with @x,y where several pads share a name; then routed paths per layer and width w, separated by ;. In a path a pad name is that pad's centre, name@x,y a point inside that pad or via, vN(x,y) a via of type N, cw(c..) or ccw(c..) an arc to the next point about the centre after c; other vN are vias at no path point)
1V8: C104.1 C105.1 C109.1 C111.1 C211.1 C303.1 C304.1 C305.1 L300.2 P100.10 P104.1 Q100.2 R101.2 R102.2 R305.2 R306.2 U100.1 U100.12 U100.29 U100.35 U100.36 U201.B2 U201.C3 | length 1287.4
  Top w7: C109.1@683.02,1212 v1(718,1212) ; v1(689.98,999.02) C105.1@720,999.02 ; v3(718.38,1127.62) U100.29@752.91,1127.62 ; C105.1@721.13,1000.16 721.13,1033.13 U100.35@752.91,1033.13 ; 721.75,1017.39 U100.36@752.91,1017.39 ; R101.2@872,1321.81 884.5,1321.81 ; v1(884.5,1341.5) 884.5,1321.81 ; R102.2@897,1321.81 884.5,1321.81 ; U100.1@991.09,1017.39 1014.64,1017.39 C104.1@1037,995.02 v7(1060.02,995.02) ; v1(1000,1236) 1000,1190.61 U100.12@991.09,1190.61 1020.66,1190.61 1025,1194.95 C111.1@1025,1201.98 ; v6(1077.75,797.25) Q100.2@1077.75,822.32 ; v2(1262,1399) C211.1@1261.98,1423 v1(1261.98,1475.02) ; v2(1262.26,1338.37) U201.C3@1281.94,1318.68 ; v7(1521,880) 1539.96,861.04 R306.2@1541,861.04
  Top w10: P100.10@890,1702.5 890,1616 v1(920,1586) ; v6(1362,665) 1482.46,665 1493.23,654.23 L300.2@1525.44,654.23 ; R305.2@1525.98,615.02 C303.1@1525.98,693.23 ; v1(1772,1664) P104.1@1772,1728.32 P104.1@1772,1843.68
  Layer 2 w7: v3@718,1127.62 v1(718,1212) ; v2(1262,1399) 1262,1385 1280.89,1366.11 1280.89,1357 v2(1262.26,1338.37)
3V3: C308.1 U302.1 U302.8 U302.9 | length 359
  Top w7: U302.1@1770.15,1097.12 1790.78,1097.12 1793.16,1094.74 1793.16,1014.29 1797.56,1009.89 1878,1009.89 1880.9,1007 1880.9,987.39 U302.8@1880.39,986.88
  Top w10: U302.8@1880.39,986.88 1914.88,986.88 ; U302.9@1914.88,1019.32 1914.88,986.88 ; C308.1@1983.89,968.73 1954.27,968.73 1936.12,986.88 1914.88,986.88
5V: C307.1 C309.1 D300.A D301.1 P103.10 R308.2 U302.10 | length 1212.4
  Top w10: P103.10@1594,311.5 1631.5,349 v9(1647,349) ; v9(1837.53,685.47) D300.A@1837.53,715.23 ; D300.A@1837.64,715.34 D301.1@1888,715.34 ; D301.1@1890.66,718 v6(1944,718) ; U302.10@1913.85,1045.94 1954.94,1045.94 1959,1050 ; v6(1975,1035) 1960,1050 1959,1050 ; C309.1@1977,1090.62 1977,1068 1959,1050 ; C309.1@1978.89,1088.73 R308.2@2088.3,1088.73
  Layer 2 w10: v9(1647,349) 1713,349 1837.53,473.53 v9(1837.53,685.47)
  Bottom w10: v6(1944,718) 1975,749 v6(1975,1035)
\LED_CS: P100.3 U100.6 U201.C5 | length 1196.3
  Top w6: U100.6@991.09,1096.13 v3(1321.87,1096.13) ; P100.3@1190,1877.5 1247,1820.5 1247,1619 1289,1577 v3(1289,1523)
  Layer 3 w6: v3(1289,1523) 1357,1455 1357,1354 1321.69,1318.68 v3(1321.31,1318.68) v3(1321.87,1096.13)
\LED_RST: P100.6 U100.9 U201.F3 | length 955
  Top w6: U100.9@991.09,1143.37 v3(1181,1143.37) 1198.37,1143.37 1281.94,1226.94 U201.F3@1281.94,1259.63 ; P100.6@1090,1702.5 1122,1670.5 v3(1122,1483)
  Layer 3 w6: v3(1122,1483) 1122,1202.37 v3(1181,1143.37)
\PB_IN: P103.8 Q100.1 R104.1 SW100.1 U300.C4 | length 2886.2
  Top w6: SW100.1@1742.13,107.26 1742.13,166.87 1673,236 1673,314 1755,396 v10(1755,565) R104.1@1782.81,565
  Top w10: Q100.1@1046.25,822.32 1046.25,598.75 1234,411 1234,29 1248,15 1522,15 ; P103.8@1494,311.5 1539,266.5 1539,32 1522,15 ; SW100.1@2007.87,107.26 SW100.1@1742.13,107.26 1742.13,62.13 1695,15 1522,15
  Layer 2 w6: v2(1624,811.23) 1640,795.23 1640,720 1751,609 1751,569 v10(1755,565)
\RESET: P104.2 SW101.1 U100.23 | length 1896.8
  Top w6: U100.23@801.13,1223.09 v2(801.13,1274.87) ; v2(1352,1553) 1547.27,1553 1672,1677.73 P104.2@1672,1728.32
  Top w10: P104.2@1672,1728.32 P104.2@1672,1843.68 1672,1899 1707,1934 1869.87,1934 SW101.1@1919.13,1884.74 SW101.1@2184.87,1884.74
  Layer 2 w6: v2(801.13,1274.87) 801.13,1340.13 1014,1553 v2(1352,1553)
ANT1: U100.31 U101.4 | length 66.1
  Top w5.5: U101.4@691.48,1103.03 698.39,1096.13 U100.31@752.91,1096.13 U100.31@751.65,1094.87
ANT2: U100.32 U101.3 | length 65.9
  Top w5.5: U101.3@691.48,1069.57 702.29,1080.38 U100.32@752.91,1080.38
ANT_MATCH: A100.1 C108.1 R100.2 | length 94.7
  Top w8: C108.1@96,1069 A100.1@96.03,1140.53 ; C108.1@96.98,1069.98 R100.2@120.19,1069.98
ANT_OUT: C107.1 R100.1 U101.1 | length 508.3
  Top w8: R100.1@143.81,1069.98 C107.1@170,1070 ; C107.1@170,1069.57 U101.1@652.11,1069.57
BATT-: C306.2 J301.2 Q300.4 R312.1 U301.4 | length 437.8
  Top w10: R312.1@1989.81,390.73 1989.81,403.81 2003.27,417.27 U301.4@2003.27,430.73 2023,430.73 ; Q300.4@1993.59,597.15 2011.74,579 v2(2013,579) ; v2(2023,414) 2023,430.73 ; C306.2@2099.02,422.45 2084.57,408 2058.46,408 2035.73,430.73 2023,430.73 ; C306.2@2099.02,425.73 J301.2@2167.25,425.73
  Layer 2 w10: v2(2013,579) 2023,569 v2(2023,414)
BLUE1: D200.2 U201.A6 | length 758.4
  Top w6: U201.A6@1341,1358.06 v2@1877,1358.06 ; v2(1877,1300) 1877,1285 1921,1241 1968,1241 1986.65,1259.65 D200.2@1986.65,1273.47
  Layer 2 w6: v2(1877,1300) v2(1877,1358)
BLUE2: D201.2 U201.A2 | length 800.3
  Top w6: v3(1907,1471) 1981,1471 1986.65,1476.65 D201.2@1986.65,1503.47
  Bottom w6: v3(1262.26,1358.06) 1282.06,1358.06 1299,1375 1542.28,1375 1638.28,1471 v3(1907,1471)
BLUE3: D202.2 U201.D6 | length 931.1
  Top w6: v2(1862,1299) 1862,1268 1900,1230 2175,1230 2191.65,1246.65 D202.2@2191.65,1273.47
  Layer 2 w6: v2(1341,1299) v2(1862,1299)
BLUE4: D203.2 U201.E1 | length 1077.8
  Top w6: v3(2186.65,1467.35) D203.2@2186.65,1504.47
  Bottom w6: v3@1242,1279.89 1242,1288 1260,1306 1328.31,1306 1341,1318.68 1341,1342 1361,1362 1546,1362 1639,1455 2093,1455 2105.35,1467.35 v3(2186.65,1467.35)
  other v3: 1242.57,1279.31
BUTTON: P103.3 Q100.3 R105.2 U100.45 | length 1068.9
  Top w7: U100.45@911.37,984.91 911.37,963.78 1013.47,861.68 Q100.3@1062,861.68 1105.13,861.68 R105.2@1112,854.81 1126.19,854.81 1253,728 1253,177.5 P103.3@1294,136.5
GND: A100.2 A100.3 C100.2 C101.2 C102.2 C104.2 C105.2 C107.2 C108.2 C109.2 C110.2 C111.2 C200.2 C201.2 C204.2 C205.2 C206.2 C207.2 C208.2 C209.2 C210.2 C211.2 C213.2 C214.1 C300.2 C301.2 C302.2 C304.2 C305.2 C307.2 C308.2 C309.2 D301.2 D302.1 D303.2 J300.5 P100.9 P101.9 P102.9 P103.9 P104.4 Q300.1 R105.1 R200.1 R201.1 R202.1 R300.1 R301.1 R304.1 R307.1 R311.1 RT300.2 SW100.2 SW101.2 U100.13 U100.33 U100.34 U100.49 U101.2 U101.6 U200.B3 U201.A5 U201.D1 U201.E4 U201.F1 U201.F4 U201.F5 U300.A2 U300.B1 U300.B2 U300.C1 U300.E1 U302.3 U302.13 U302.17 X100.2 X100.4 | length 3172.6
  Top w8: v9(1242.57,1234.43) U201.F1@1242.57,1259.63
  Top w10: v1(41.35,1091.4) 56.66,1106.71 A100.3@56.66,1128.72 ; A100.2@56.66,1229.11 v1(56.66,1328.09) ; v1(96,1022) C108.2@96,1046.95 ; v1(119,1427) 136.5,1444.5 P101.9@136.5,1495 ; v1(170,1022) C107.2@170,1047.95 ; C210.2@540.3,1524.19 568,1524.19 ; v1(568,1507) 568,1524.19 ; R200.1@595,1524.19 568,1524.19 ; v1@623,1128 C110.2@648.98,1128 U101.6@648.98,1106.17 ; v1(630,1212) C109.2@660.98,1212 ; U200.B3@649,1622.68 v5(649,1651) ; v1@671.8,1040.2 U101.2@671.8,1069.57 ; C208.2@720,1533.89 C209.2@792,1533.89 ; v1(726.63,1050.37) 726.63,1064.63 U100.33@752.91,1064.63 ; v1@728.12,1048.88 U100.34@752.91,1048.88 ; C101.2@767,850.02 v7(787.02,850.02) 795.68,858.68 X100.4@821.41,858.68 ; v1(826,1911) 859.5,1877.5 P100.9@890,1877.5 ; v1(838,909) C100.2@838.02,929 ; U100.49@872,1104 v4(895.62,1080.38) v4(942.87,1033.13) 1003.02,972.98 C104.2@1037,972.98 ; X100.2@872.59,819.32 897,819.32 ; v7(897,795) 897,819.32 ; C102.2@917.34,819.32 897,819.32 ; P102.9@924,136.5 937.5,136.5 v1(985,89) ; U100.13@958.61,1223.09 958.61,1244.61 973,1259 v1(973,1286) ; v1(1021,1295) 1025,1291 C111.2@1025,1224.02 ; v1(1089,1432.84) C205.2@1161.21,1432.84 1161.21,1413.79 1176.76,1398.24 C206.2@1176.76,1384.84 C207.2@1176.76,1357.84 ; R105.1@1112,831.19 1112,809 v7(1121,800) ; R201.1@1112.76,1299 U201.D1@1242.57,1299 ; C211.2@1284.02,1423 v1(1284.02,1443.98) ; U201.E4@1301.63,1279.31 U201.F4@1301.63,1259.63 U201.F5@1321.31,1259.63 v9(1321.31,1239.32) ; U201.A5@1321.31,1358.06 R202.1@1321.31,1395.5 ; R202.1@1322,1396.19 1362.19,1396.19 v7(1389,1423) ; v1(1472,1655) P104.4@1472,1728.32 P104.4@1472,1843.68 ; RT300.2@1479.81,737.61 R301.1@1532,737.61 ; v1(1554,1172) C204.2@1554,1220.43 1603.54,1220.43 C200.2@1612,1228.89 C201.2@1657,1228.89 ; U300.C1@1576.76,811.23 U300.B1@1576.76,826.98 U300.B2@1592.5,826.98 U300.A2@1592.5,842.72 1592.5,861.5 v6(1578,876) ; P103.9@1594,136.5 1635.5,136.5 v1(1655,156) ; C300.2@1655,559.62 C302.2@1721,559.62 ; R300.1@1689,753.23 v1(1716.77,753.23) ; C301.2@1691,678.12 v1(1724.88,678.12) ; D303.2@1712,1040.62 1714.62,1038 1735,1038 1742.94,1045.94 U302.3@1770.15,1045.94 ; SW100.2@1742.13,264.74 1742.13,301.13 v1(1768,327) ; U302.17@1842,1058.73 1880.39,1097.12 U302.13@1880.39,1130.58 1880.39,1156.61 1870.11,1166.89 D302.1@1870.11,1188.73 ; v1(1871,461) 1884.35,474.35 R311.1@1908,474.35 1942.41,508.76 Q300.1@1942.41,524.32 ; v1(1888,649) D301.2@1888,679.12 ; v1(1919.13,1672.13) SW101.2@1919.13,1727.26 ; SW100.2@2007.87,264.74 v1(2007.87,321.87) ; C308.2@2020.11,968.73 v1(2020.11,1004.89) ; v1(2081.91,959.91) J300.5@2131.74,959.91 ; v1(2184.87,1675.13) SW101.2@2184.87,1727.26
  other v1: 2196,17 2270,17 969,18 1007,18 1042,18 1074,18 1115,18 2230,18 746,19 784,19 819,19 851,19 892,19 929,19 1779,19 1817,19 1852,19 1884,19 1925,19 2010,19 2048,19 2083,19 2115,19 2156,19 518,20 556,20 591,20 623,20 664,20 706,20 1739,20 1970,20 478,21 275,22 313,22 348,22 380,22 421,22 57,23 95,23 130,23 162,23 203,23 235,23 17,24 2270,49 17,74 2270,81 17,111 2270,119 17,148 2270,157 17,185 2270,189 17,222 2270,227 17,259 2270,271 17,296 2270,328 17,333 17,370 17,407 17,444 17,481 17,518 17,555 2270,559 17,592 2270,598 17,629 2270,642 16,668 16,718 16,768 16,817 16,854 16,903 16,953 16,1003 672,1040 168.35,1119.4 619,1124 2270,1125 28.35,1141.4 168.35,1145.4 28.35,1167.4 168.35,1167.4 2270,1169 28.35,1189.4 168.35,1189.4 2269,1207 28.35,1211.4 168.35,1215.4 28.35,1233.4 168.35,1237.4 2269,1245 28.35,1255.4 168.35,1263.4 28.35,1277.4 168.35,1289.4 2269,1296 28.35,1299.4 96.35,1317.4 119.35,1317.4 144.35,1317.4 2269,1340 2269,1384 22,1415 2269,1428 2269,1472 22,1492 2269,1510 758,1534 2269,1554 22,1570 2269,1598 2269,1642 22,1648 2269,1699 2269,1737 22,1764 2269,1794 22,1842 2269,1856 2269,1913 22,1920 2269,1964 935,1976 406,1977 760,1978 866,1978 1005,1978 1079,1978 565,1979 628,1979 689,1979 828,1979 1146,1979 1215,1979 1313,1979 1418,1979 1735,1979 2152,1979 487,1980 1369,1980 1470,1980 1514,1980 1676,1980 1782,1980 1830,1980 1885,1980 2202,1980 240,1981 1566,1981 1626,1981 1952,1981 2052,1981 29,1982 95,1982 171,1982 321,1982 2007,1982 2110,1982
  other v4: 801.13,1033.13 848.38,1033.13 895.62,1033.13 801.13,1080.38 848.38,1080.38 942.87,1080.38 801.13,1127.62 848.38,1127.62 895.62,1127.62 942.87,1127.62 801.13,1174.87 848.38,1174.87 895.62,1174.87 942.87,1174.87
  other v7: 992,984
GREEN1: D200.3 U201.B6 | length 650.7
  Top w6: U201.B6@1341,1338.37 v2@1897,1338.37 ; v2(1897,1301) 1924.53,1273.47 D200.3@1943.35,1273.47
  Layer 2 w6: v2(1897,1301) v2(1897,1338)
GREEN2: D201.3 U201.A3 | length 740.5
  Top w6: v3(1281,1388) 1281,1359.11 U201.A3@1282,1358.11 ; v3(1905.53,1503.47) D201.3@1943.35,1503.47
  Bottom w6: v3(1281,1388) 1541.14,1388 1656.62,1503.47 v3(1905.53,1503.47)
GREEN3: D202.3 U201.D5 | length 879.9
  Top w6: v2(2099,1261) D202.3@2135.87,1261
  Layer 2 w6: v2(1321.31,1299) 1302,1279.68 1302,1261 v2(2099,1261)